# Altium PCB DongHoInternet.PcbDoc
Units mil, origin at the board's own origin, x right, y up, seen from the top; angles counter-clockwise.
Board outline 2559.06 x 1968.5 mil, 2 copper layers (Top Layer, Bottom Layer); 21 components, 19 nets, 101 pads, 5 vias.
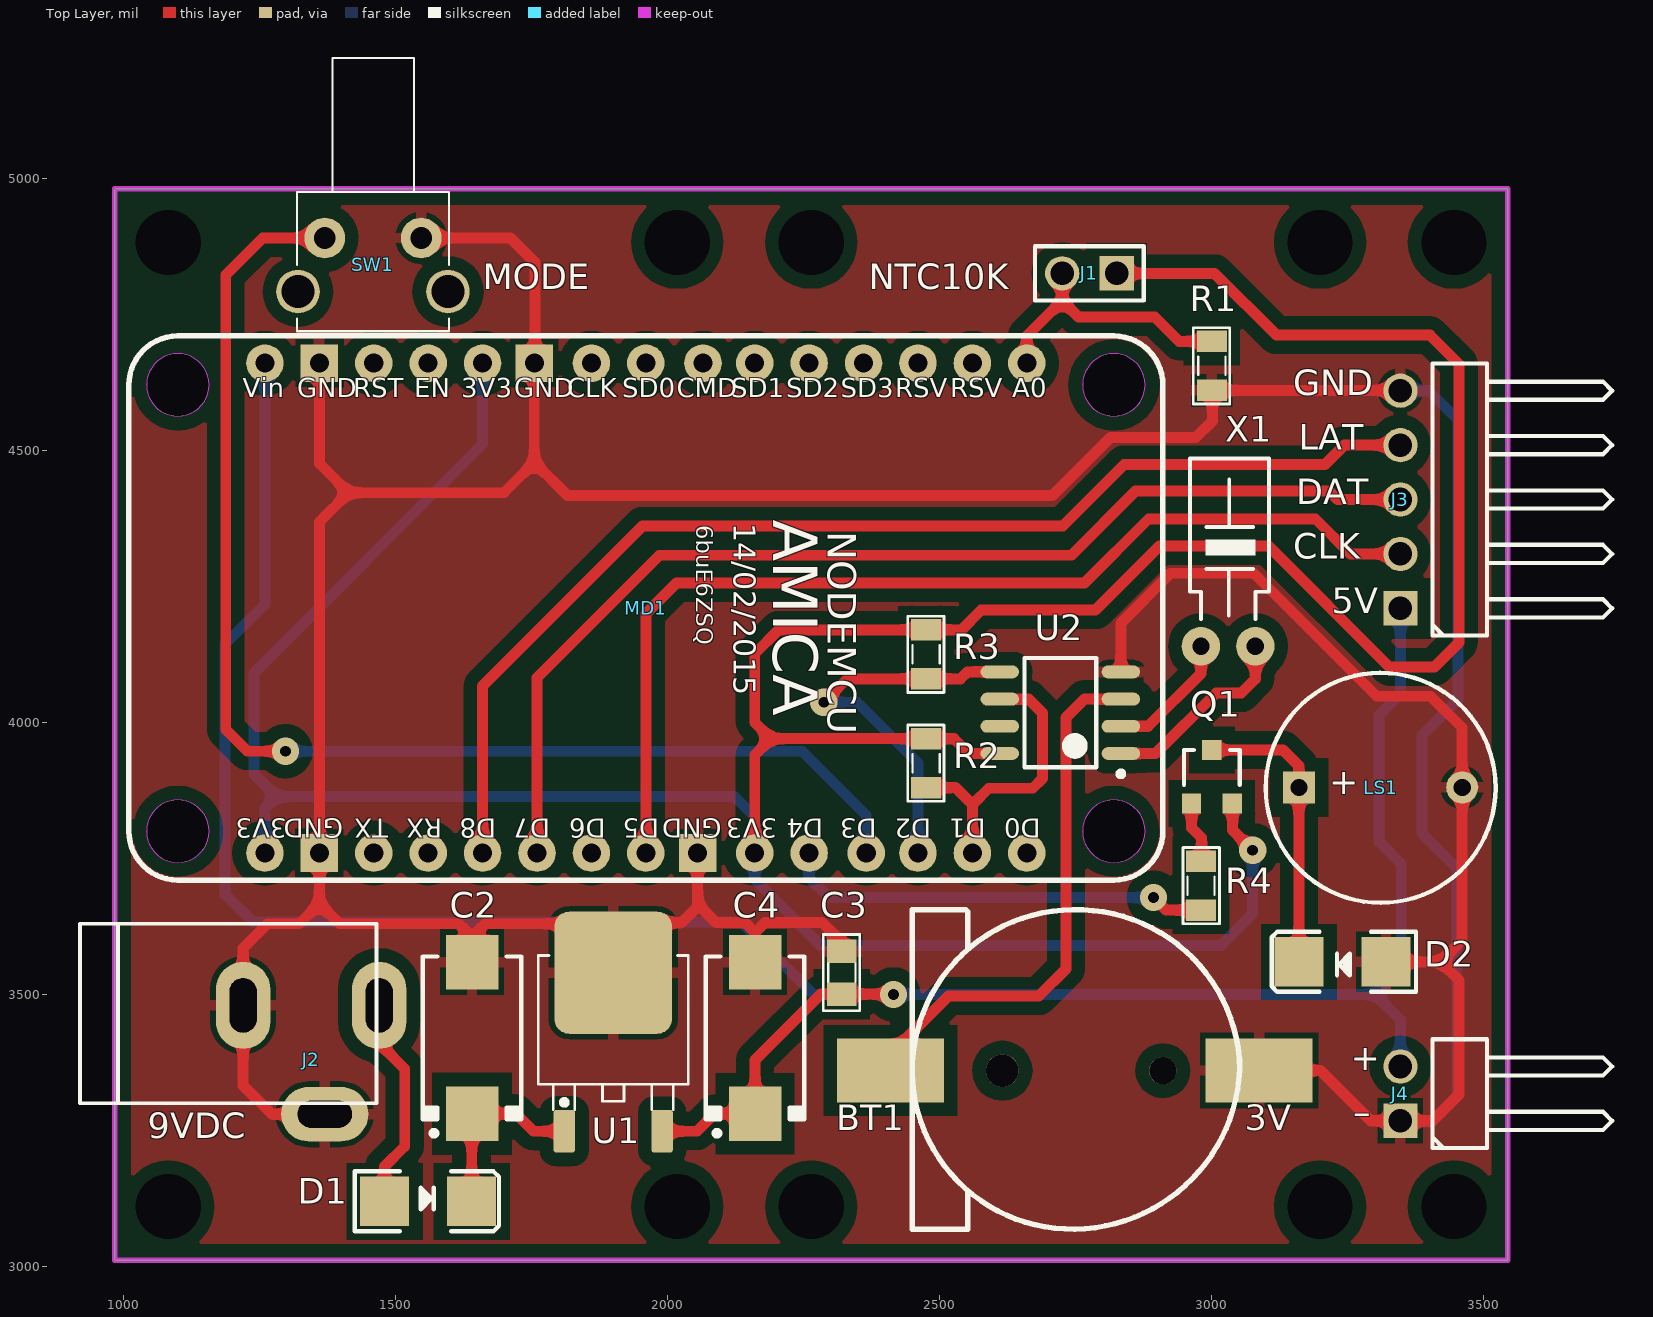
[diagram p0: Top Layer view]
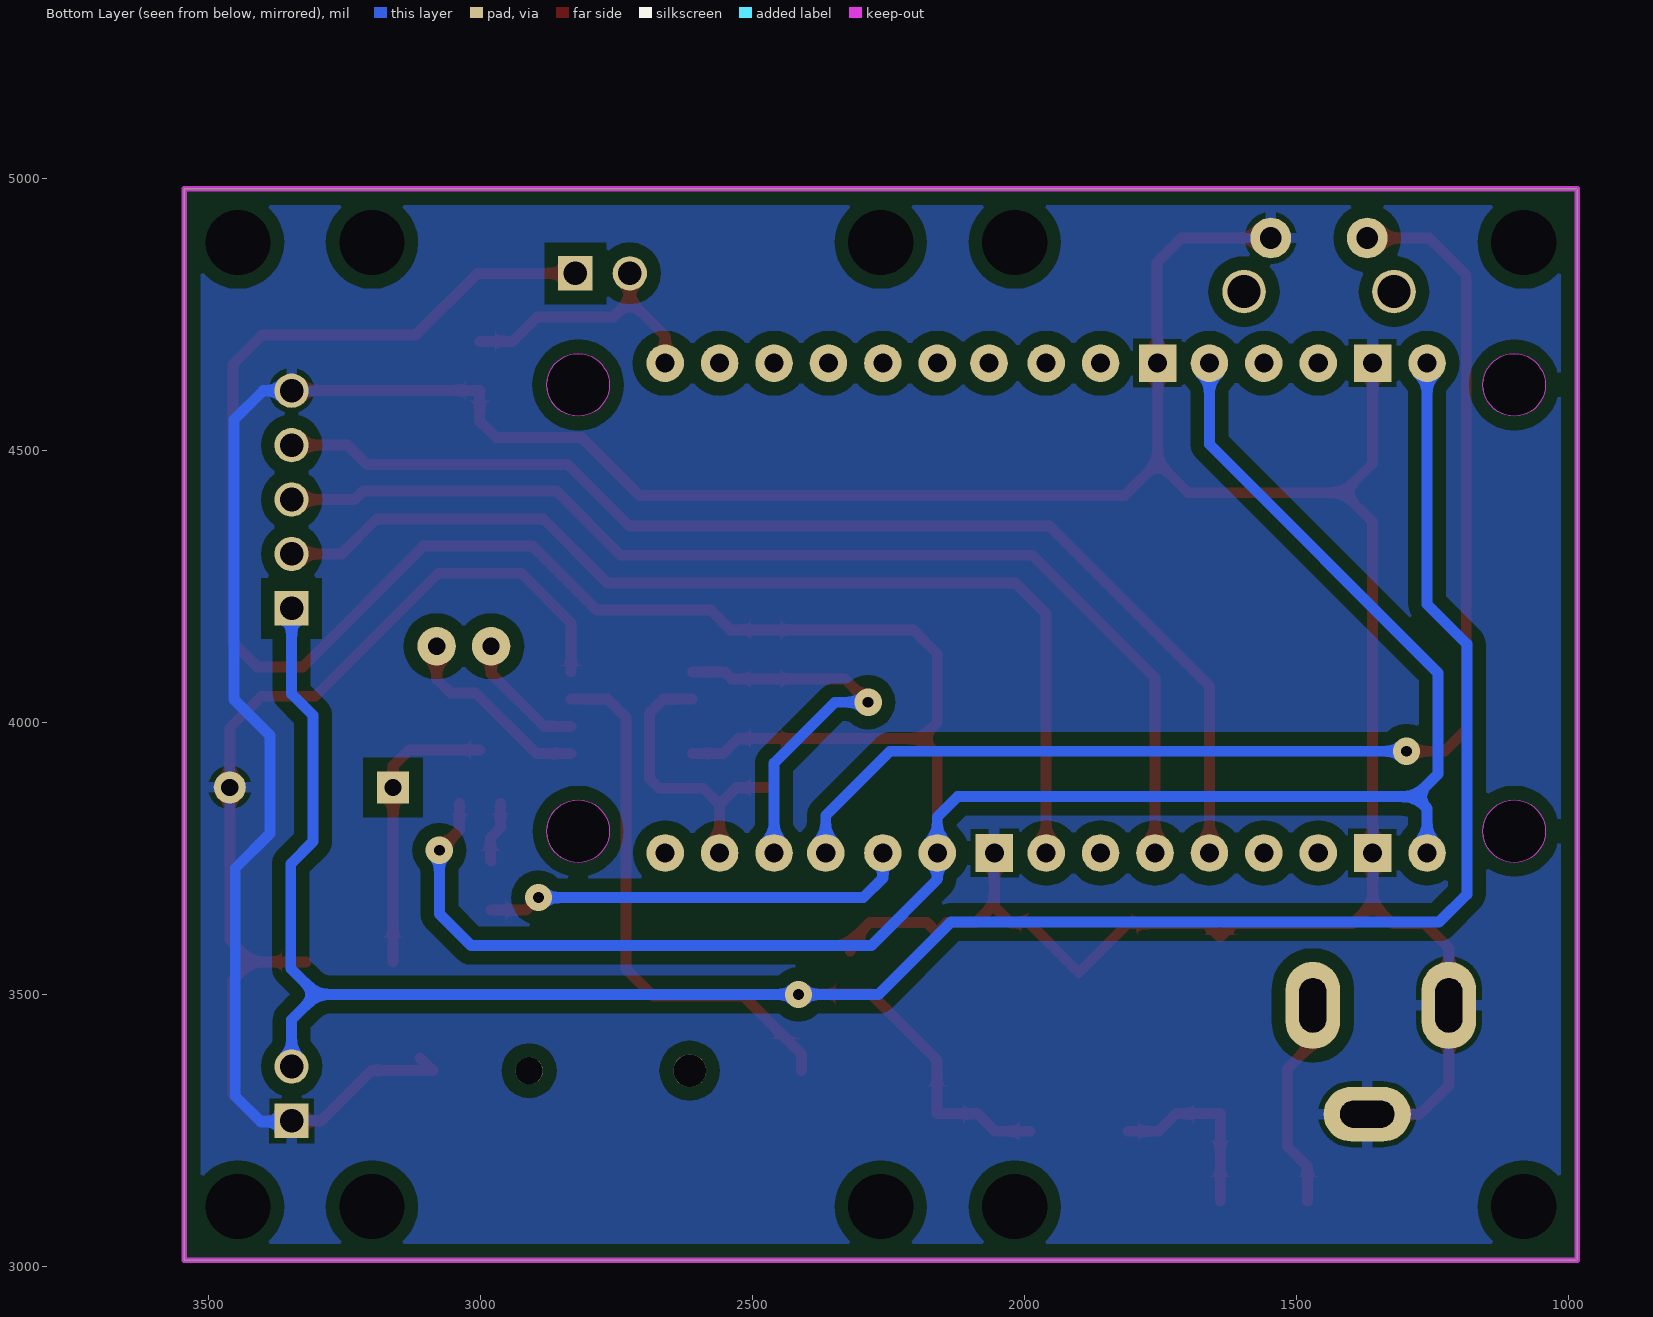
[diagram p1: Bottom Layer view, seen from below]
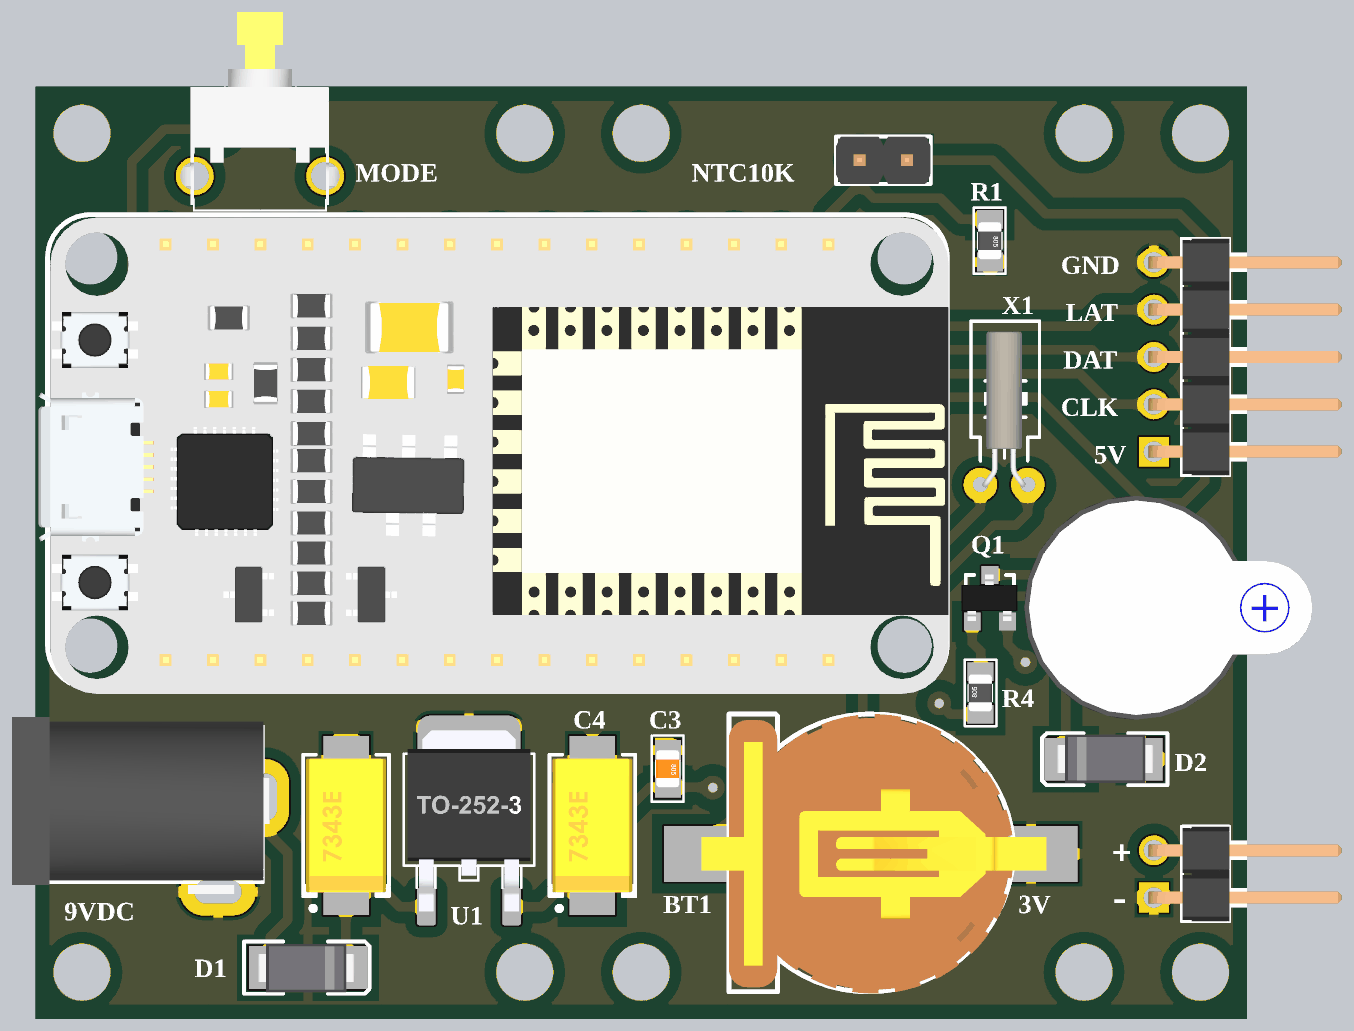
[diagram p2: 3D render of the assembled board from above, using the file's embedded part models]

## Layer stack, top to bottom
Top Solder: solder mask 0.4, Solder Resist, Dk 3.5
Top Layer: signal copper 1.4
Dielectric 1: dielectric 12.6, FR-4, Dk 4.8
Bottom Layer: signal copper 1.4
Bottom Solder: solder mask 0.4, Solder Resist, Dk 3.5

## Board outline
984.25,3011.81 984.25,4980.31 3543.31,4980.31 3543.31,3011.81

## Design rules (kind name [scope] priority, off if disabled: settings)
Clearance Clearance_3 [InNamedPolygon('Bottom-GND')] p1: gap=25
Clearance Clearance_2 [InNamedPolygon('Top-GND')] p2: gap=25
Clearance Clearance_1 [InNamedPolygon('Bottom-GND')] p3: gap=10
Clearance [All] p4: gap=10
PolygonConnect PolygonConnect_2 [All vs IsNamedPolygon('Top-GND')] p1: connectstyle=Relief reliefconductorwidth=20 reliefentries=4 polygonreliefangle="90 Angle" airgapwidth=10
PolygonConnect PolygonConnect_1 [All vs IsNamedPolygon('Bottom-GND')] p2: connectstyle=Relief reliefconductorwidth=20 reliefentries=4 polygonreliefangle="90 Angle" airgapwidth=10
PolygonConnect [All] p3: connectstyle=Relief reliefconductorwidth=10 reliefentries=4 polygonreliefangle="90 Angle" airgapwidth=10
RoomDefinition DongHoInternet [InComponentClass('DongHoInternet')] p1: confinementstyle=ConfineIn formatcopy=TRUE lockcomponents=FALSE outline 0,0 2000,0 2000,1000 0,1000
RoutingVias [All] p1: holewidth=28 width=50 viastyle="Through Hole" minholewidth=28 minwidth=50 maxholewidth=28 maxwidth=50
SolderMaskExpansion [All] p1: expansion=4
Width [All] p1: maxlimit=50 minlimit=10 preferedwidth=20
30 further rules are at their usual default settings.

## Components (designator, comment, footprint, x,y, rotation, side; value= is the part's Value field where it differs from the comment)
BT1 "CR1220" "PIN CR1220" 2720,3360 r270 top locked
C2 "100uF" "TU TANTALUM" 1640,3420 r90 top
C3 "100nF" CN-SMD-0805 2320,3540 r270 top
C4 "100uF" "TU TANTALUM" 2160,3420 r90 top
D1 "Diode SMD" DIO-SMD-106 1560,3120 r180 top
D2 "Diode SMD" DIO-SMD-106 3240,3560 r0 top
J1 "NTC10K" JP2-D1T 2825,4825 r180 top
J2 "9VDC" DC0 1345,3380 r0 top
J3 "JP5" JP5-D1C 3446.46,4659.45 r90 top
J4 "5V" JP2-D1C 3346.46,3267.72 r90 top
LS1 "Speaker" SPEAKER 3160,3880 r0 top
MD1 "NODEMCUV1" NODEMCUV1 2906,4711 r270 top locked
Q1 "2SA1015" SOT23-321 3000,3900 r0 top
R1 "10k" RES-SMD-0805 3000,4655 r270 top
R2 "1.5k" RES-SMD-0805 2475,3925 r270 top
R3 "1.5k" RES-SMD-0805 2475,4125 r270 top
R4 "2.7k" RES-SMD-0805 2980,3700 r90 top
SW1 "MODE" SW-OMRONRA-Y 1547.16,4890 r180 top
U1 "LM78xx" TO252-123 1900,3394.33 r0 top
U2 "DS1307" DS1307 2716.54,4015.75 r90 top
X1 "32.768k" XT32k 2980,4140 r90 top

## Footprints (in the part's own frame and the unit in brackets; to place one, negate y for a bottom-side part, rotate by r counter-clockwise, add the part's x,y. Pads: shape width x height; smd on the part's side, far side on the other; paste and mask are expansions set on the pad)
CN-SMD-0805 [mil]
  rect 43.31x55 smd: 1(-39.36,0.01) 2(39.37,0.01)
  silkscreen extent -70,-34 70,33, body extent -39,-25 39,25, height 31
DC0 [mil] "Jac DC input"
  oval 100x160 hole 50 slot 100 at 90 deg: 1(125,100) 2(-125,100)
  oval 160x100 hole 50 slot 100 at 0 deg: 3(25,-100)
  silkscreen extent -425,-80 120,250, body extent -410,-105 134,269, height 434
DIO-SMD-106 [mil]
  rect 90x90.55 smd: 1(80,0) 2(-80,0)
  silkscreen extent -130,-55 135,55, body extent -99,-50 106,52, height 95
DS1307 [mm]
  oval 0.6x1.8 smd: 1(-1.854,-2.952) 2(-0.584,-2.952) 3(0.686,-2.952) 4(1.956,-2.952) 5(1.956,2.698) 6(0.686,2.698) 7(-0.584,2.698) 8(-1.854,2.698)
  silkscreen extent -2.93,-3.08 2.6,1.55, body extent -2.4,-3.12 2.5,2.87, height 1.6
JP2-D1C [mm] "2 pins, 1 row, right angled, gold plating"
  rect 1.6x1.6 hole 1.1: 1(0,0)
  round 1.6 hole 1.1: 2(2.54,0)
  silkscreen extent -1.27,-9.88 3.81,-1.5, body extent -1.27,-10.06 3.81,0.3, height 2.55
JP2-D1T [mm] "2 pins, 1 row, straight, gold plating"
  rect 1.6x1.6 hole 1.1: 1(0,0)
  round 1.6 hole 1.1: 2(2.54,0)
  silkscreen extent -1.27,-1.27 3.81,1.27, body extent -1.27,-1.27 3.81,1.27, height 8.54
JP5-D1C [mm] "5 pins, 1 row, right angled, gold plating"
  rect 1.6x1.6 hole 1.1: 1(-11.43,2.54)
  round 1.6 hole 1.1: 2(-8.89,2.54) 3(-6.35,2.54) 4(-3.81,2.54) 5(-1.27,2.54)
  silkscreen extent -12.7,-7.34 0,1.04, body extent -12.7,-7.52 0,2.84, height 2.55
NODEMCUV1 [mil]
  round 115 hole 115 unplated paste-300 mask-300: 0(91,-86) 0(91,-1806) 0(911,-86) 0(911,-1806)
  round 69 hole 35: 3V3(51,-1246) 3V3(951,-746) 3V3(951,-1646) A0(51,-246) CLK(51,-1046) CMD(51,-841) D0(951,-246) D1(951,-346) D2(951,-446) D3(951,-541) D4(951,-646) D5(951,-946) D6(951,-1046) D7(951,-1146) D8(951,-1246) EN(51,-1346) RST(51,-1446) RSV(51,-346) RSV(51,-446) RX(951,-1346) SD0(51,-946) SD1(51,-746) SD2(51,-646) SD3(51,-546) TX(951,-1446) VIN(51,-1646)
  rect 69x69 hole 35: GND(51,-1151) GND(51,-1546) GND(951,-851) GND(951,-1546)
  Keep-Out Layer circle w2: c91,-86 r57.5
  Keep-Out Layer circle w2: c911,-86 r57.5
  Keep-Out Layer circle w2: c91,-1806 r57.5
  Keep-Out Layer circle w2: c911,-1806 r57.5
  silkscreen extent 1,-1896 1001,4, body extent 7,-1915 1013,7, height 306
"PIN CR1220" [mil]
  round 50 hole 50: 0(0,190)
  round 60 hole 60: 0(0,-105)
  rect 118.11x196.85 smd: 1(-0.28,-310.2) 2(-0.28,366.97)
  silkscreen extent -296,-271 291,332, body extent -295,-329 295,399, height 159
RES-SMD-0805 [mil]
  rect 39.37x55 smd: 1(-45,0) 2(45,0)
  silkscreen extent -70,-34 70,33, body extent -39,-25 39,25, height 31
SOT23-321 [mm]
  rect 0.9x0.95 smd mask+0: 1(0.95,-1.25)
  rect 0.9x0.95 smd: 2(0,1.25) 3(-0.95,-1.25)
  silkscreen extent -1.3,-0.38 1.3,1.25, body extent -1.52,-1.23 1.48,1.27, height 1.06
SPEAKER [mm]
  rect 1.5x1.5 hole 0.8: 1(0,0)
  round 1.5 hole 0.8: 2(7.62,0.013)
  silkscreen extent -1.55,-5.38 9.18,5.36, body extent -2.22,-6 13.24,6, height 4.5
SW-OMRONRA-Y [mil]
  round 75 hole 40: 1(0,0) 2(177.16,0)
  round 80 hole 60: M1(-49.21,98.43) M2(226.38,98.43)
  silkscreen extent -51,-331 228,171, body extent -87,-398 265,160, height 283
TO252-123 [mm]
  round 0.5 on Mech15: 0(0,0)
  rrect25% 1x2 smd: 1(-2.285,-3.7) 3(2.285,-3.7)
  rrect25% 5.5x5.7 smd: 2(0,3.7)
  silkscreen extent -3.5,-2.7 3.5,4.5, body extent -3.3,-3.95 3.3,5.76, height 2.31
"TU TANTALUM" [mm]
  rect 2.55x2.45 smd: 1(-3.529,-0.014) 2(3.537,-0.014)
  silkscreen extent -4.57,-2.31 3.8,2.29, body extent -3.65,-2.16 3.65,2.14, height 4.1
XT32k [mm]
  round 1.8 hole 0.813: 1(0,0) 2(0,-2.54)
  silkscreen extent 1.27,-3.17 8.76,0.51, body extent -0.15,-2.42 8.2,-0.12, height 1.95

## Part data
BT1: library part "PIN CR1220"
C2 C4: library part "CAP TANTALUM"
C3: library part CN
D1 D2: "Default Diode"
J1 J4: library part JP2, "WR-PHD 2.54 mm Angled Socket Header"
J2: library part DCIN, "Jac DC input"
J3: "WR-PHD 2.54 mm Angled Socket Header"
LS1: "Loudspeaker"
Q1: "PNP 600mW, ECB"
R1 R2 R3 R4: library part Res-SMD, "Resistor"
SW1: library part SW-PB-YELLOW-RA, "SW-D6-R / SW-DS-S / SW-14X14 / SW-7X7"
U1: "Positive Voltage Regulator"
X1: library part XT2, "Crystal, 32.768 KHz, -40 to 85 degC, 3.2 x 1.5 x 0.9 mm SMD"

## Free pads (board coordinates)
  round 60 hole 120: 0(1082.68,4881.89) 1(1082.68,3110.24) 2(3198.82,4881.89) 3(3198.82,3110.24) 4(2017.72,4881.89) 5(2263.78,4881.89) 6(2017.72,3110.24) 7(2263.78,3110.24) 8(3444.88,4881.89) 9(3444.88,3110.24)

## Via types
v1: diameter 50, hole 20, Top Layer to Bottom Layer, tented both sides, 5 vias

## Nets (pads, with @x,y where several pads share a name; then routed paths per layer and width w, separated by ;. In a path a pad name is that pad's centre, name@x,y a point inside that pad or via, vN(x,y) a via of type N, cw(c..) or ccw(c..) an arc to the next point about the centre after c; other vN are vias at no path point)
3V3: J1.1 MD1.3V3 Q1.1 R2.1 R3.1 U2.8 | length 6834.8
  Top Layer w20: MD1.3V3@2160,3760 2160,3940 2190,3970 ; U2.8 2553.25,3942.75 2526,3970 R2.1 2190,3970 ; J1.1 3005,4825 3118.5,4711.5 3400.5,4711.5 3454,4658 3454,4147 3409,4102 3326,4102 3104,4324 2904,4324 2786.3,4206.3 2576.3,4206.3 2540,4170 R3.1 2204,4170 2160,4126 2160,4000 2190,3970 ; Q1.1 3038,3850.19 3038,3802 v1(3075,3765)
  Bottom Layer w20: MD1.3V3@1260,3760 1260,3842 1281.5,3863.5 ; MD1.3V3@1660,4660 1660,4511 1240,4091 1240,3905 1281.5,3863.5 ; v1(3075,3765) 3075,3648 3017,3590 2281,3590 2160,3711 2160,3760 2160,3826 2122.5,3863.5 1281.5,3863.5
5V: C3.2 C4.1 J3.1 J4.2 MD1.VIN U1.3 | length 4697
  Top Layer w20: U1.3 2053.66,3248.66 2086.05,3281.05 C4.1 2160.57,3379.57 2281.63,3500.63 C3.2 2414.37,3500.63 v1(2415,3500)
  Bottom Layer w20: MD1.VIN 1260,4217 1187,4144 1187,3684 1238,3633 2135,3633 2268,3500 v1(2415,3500) 3300,3500 ; J4.2 3346.46,3453.54 3300,3500 ; J3.1 3346.46,4052.46 3307,4013 3307,3781 3348,3740 3348,3548 3300,3500
GND: BT1.2 C2.2 C3.1 C4.2 D2.1 J2.2 J2.3 J3.5 J4.1 LS1.2 MD1.GND R1.2 SW1.1 U1.2 U2.4 | length 9255.6
  Top Layer w20: MD1.GND@1362,4662 1360,4660 1360,4476 1414,4422 ; J2.3 1273,3280 1220,3333 J2.2 1220,3585 1265,3630 1323,3630 1360,3667 ; SW1.1 1711,4890 1756,4845 1756,4661 1755,4660 1755,4478 ; MD1.GND@2055,3760 2055,3666 ; C3.1 2320.01,3595.99 2284,3632 2179.13,3632 2160.57,3613.43 2142,3632 2089,3632 2055,3666 ; U2.4 2832.76,4182.76 2924,4274 3077,4274 3303,4048 3402,4048 3460,3990 LS1.2 3460,3600 3420,3560 ; BT1.2@3110.24,3383.54 BT1.2 3199.72,3360.28 3292.28,3267.72 J4.1 3405.72,3267.72 3454,3316 3454,3526 3420,3560 ; D2.1 3420,3560 ; J3.5 3345.91,4610 R1.2 3001,4609 3001,4554 2970.5,4523.5 2813.5,4523.5 2707,4417 1816,4417 1755,4478 ; 1360,3667 1360,3760 1360,4368 1414,4422 ; 1360,3667 1397,3630 1616,3630 1640.57,3605.43 1665.13,3630 1810,3630 U1.2 1992,3632 2026,3632 2055,3661 2055,3666 ; 1414,4422 1699,4422 1755,4478
  Bottom Layer w20: J4.1 3348.17,3266 3403,3266 3450,3313 3450,3732 3386,3796 3386,3976 3452,4042 3452,4556 3398.55,4609.45 J3.5
LATCH: J3.4 MD1.D8 | length 2176.7
  Top Layer w20: MD1.D8 1660,4067 1954,4361 2726,4361 2839,4474 3208,4474 3243.45,4509.45 J3.4
MISO: MD1.D6
MOSI: J3.3 MD1.D7 | length 2057
  Top Layer w20: MD1.D7 1760,4082 1985,4307 2742,4307 2860,4425 3215,4425 3230.55,4409.45 J3.3
NetBT1_1: BT1.1 U2.3 | length 994.2
  Top Layer w20: BT1.1 2409.8,3390.8 2516,3497 2682,3497 2732,3547 2732,4009 2765.75,4042.75 U2.3
NetC2_1: C2.1 D1.2 U1.1 | length 344.2
  Top Layer w20: D1.2 1640,3280.49 C2.1 1720.94,3281.05 1753.34,3248.66 U1.1
NetD1_1: D1.1 J2.1 | length 394.8
  Top Layer w20: J2.1 1470,3410 1517,3363 1517,3221 1480,3184 D1.1
NetD2_2: D2.2 LS1.1 Q1.2 | length 532.1
  Top Layer w20: Q1.2 3130.79,3949.21 3160,3920 LS1.1 D2.2
NetJ1_2: J1.2 MD1.A0 R1.1 | length 498
  Top Layer w20: MD1.A0 2660,4710 2725,4775 ; J1.2 2725,4775 ; R1.1 2940,4700 2895,4745 2755,4745 2725,4775
NetQ1_3: Q1.3 R4.2 | length 113.8
  Top Layer w20: Q1.3 2962.6,3806.4 2981,3788 2981,3746 R4.2
NetU2_1: U2.1 X1.2 | length 364.1
  Top Layer w20: U2.1 2896.75,3942.75 3008,4054 3054,4054 3080,4080 X1.2
NetU2_2: U2.2 X1.1 | length 237.5
  Top Layer w20: U2.2 2882.75,3992.75 2980,4090 X1.1
SCK: J3.2 MD1.D5 | length 1925.3
  Top Layer w20: MD1.D5 1960,4200 2016,4256 2766,4256 2884,4374 3190,4374 3254.55,4309.45 J3.2
SCL: MD1.D1 R2.2 U2.6 | length 540.8
  Top Layer w20: R2.2 2529,3880 2560,3849 MD1.D1 ; 2563,3852 2590,3879 2671,3879 2689,3897 2689,4017 2663.25,4042.75 U2.6
SDA: MD1.D2 R3.2 U2.5 | length 730.8
  Top Layer w20: v1(2287,4037) 2330,4080 R3.2 2538,4080 2550.75,4092.75 U2.5
  Bottom Layer w20: v1(2287,4037) 2348,4037 2460,3925 MD1.D2
SPK: MD1.D4 R4.1 | length 790.4
  Top Layer w20: v1(2893,3678) 2916,3655 R4.1
  Bottom Layer w20: MD1.D4 2260,3714 2296,3678 v1(2893,3678)
USR: MD1.D3 SW1.2 | length 2356.6
  Top Layer w20: v1(1298,3947) 1228,3947 1188,3987 1188,4822 1256,4890 SW1.2
  Bottom Layer w20: v1(1298,3947) 2247,3947 2365,3829 MD1.D3
pads on no net: BT1.0 MD1.0 MD1.CLK MD1.CMD MD1.D0 MD1.EN MD1.RST MD1.RSV MD1.RX MD1.SD0 MD1.SD1 MD1.SD2 MD1.SD3 MD1.TX SW1.M1 SW1.M2 U1.0 U2.7

## Polygon pours and split planes (outlines as drawn)
GND on Bottom Layer "Bottom-GND" (solid, remove dead copper, pour order 1): 984.25,3011.81 984.25,4980.31 3543.31,4980.31 3543.31,3011.81
GND on Top Layer "Top-GND" (solid, remove dead copper, pour order 0): 984.25,3011.81 984.25,4980.31 3543.31,4980.31 3543.31,3011.81

## Keep-outs
Keep-Out Layer:
  the board outline again, w10

## Silkscreen, mask and mechanical layers (free items; w line width, h text height)
Top Overlay:
  text "GND" at 3150,4585 h80
  text "LAT" at 3160,4485 h80
  text "DAT" at 3155,4385 h80
  text "CLK" at 3150,4285 h80
  text "5V" at 3220,4185 h80
  text "+" at 3255,3345 h80
  text "–" at 3260,3245 h80
  text "3V" at 3060,3235 h80

## Text inside footprints (layer, text, board x,y; h text height)
LS1: Top Overlay "+" at 3215.5,3852 h80
MD1: Top Overlay "GND" at 1718,4585 h60; Top Overlay "3V3" at 1621,4585 h60; Top Overlay "EN" at 1534,4585 h60; Top Overlay "RST" at 1422,4585 h60; Top Overlay "GND" at 1319,4585 h60; Top Overlay "Vin" at 1219,4585 h60; Top Overlay "D7" at 1784.77,3835 h60 r180; Top Overlay "D8" at 1684.89,3835 h60 r180; Top Overlay "RX" at 1585.94,3835 h60 r180; Top Overlay "TX" at 1487,3835 h60 r180; Top Overlay "GND" at 1403.8,3835 h60 r180; Top Overlay "3V3" at 1300,3835 h60 r180; Top Overlay "D6" at 1885.88,3835 h60 r180; Top Overlay "CMD" at 2016.86,4585 h60; Top Overlay "D0" at 2686,3835 h60 r180; Top Overlay "D1" at 2584.65,3835 h60 r180; Top Overlay "D2" at 2484.42,3835 h60 r180; Top Overlay "D3" at 2384.42,3835 h60 r180; Top Overlay "D4" at 2286,3835 h60 r180; Top Overlay "3V3" at 2200.99,3835 h60 r180; Top Overlay "GND" at 2099,3835 h60 r180; Top Overlay "D5" at 1985,3835 h60 r180; Top Overlay "A0" at 2633,4585 h60; Top Overlay "RSV" at 2519,4585 h60; Top Overlay "RSV" at 2418.57,4585 h60; Top Overlay "SD3" at 2318.14,4585 h60; Top Overlay "SD2" at 2217.71,4585 h60; Top Overlay "SD1" at 2117.29,4585 h60; Top Overlay "SD0" at 1916.43,4585 h60; Top Overlay "CLK" at 1816,4585 h60; Top Overlay "6buE6ZSQ" at 2053,4362 h30 r270; Top Overlay "NODEMCU" at 2277,4351 h90 r270; Top Overlay "AMICA" at 2167,4372 h140 r270; Top Overlay "14/02/2015" at 2108,4366 h69 r270